# EAGLE board schematic (EAGLE 9.6.2)
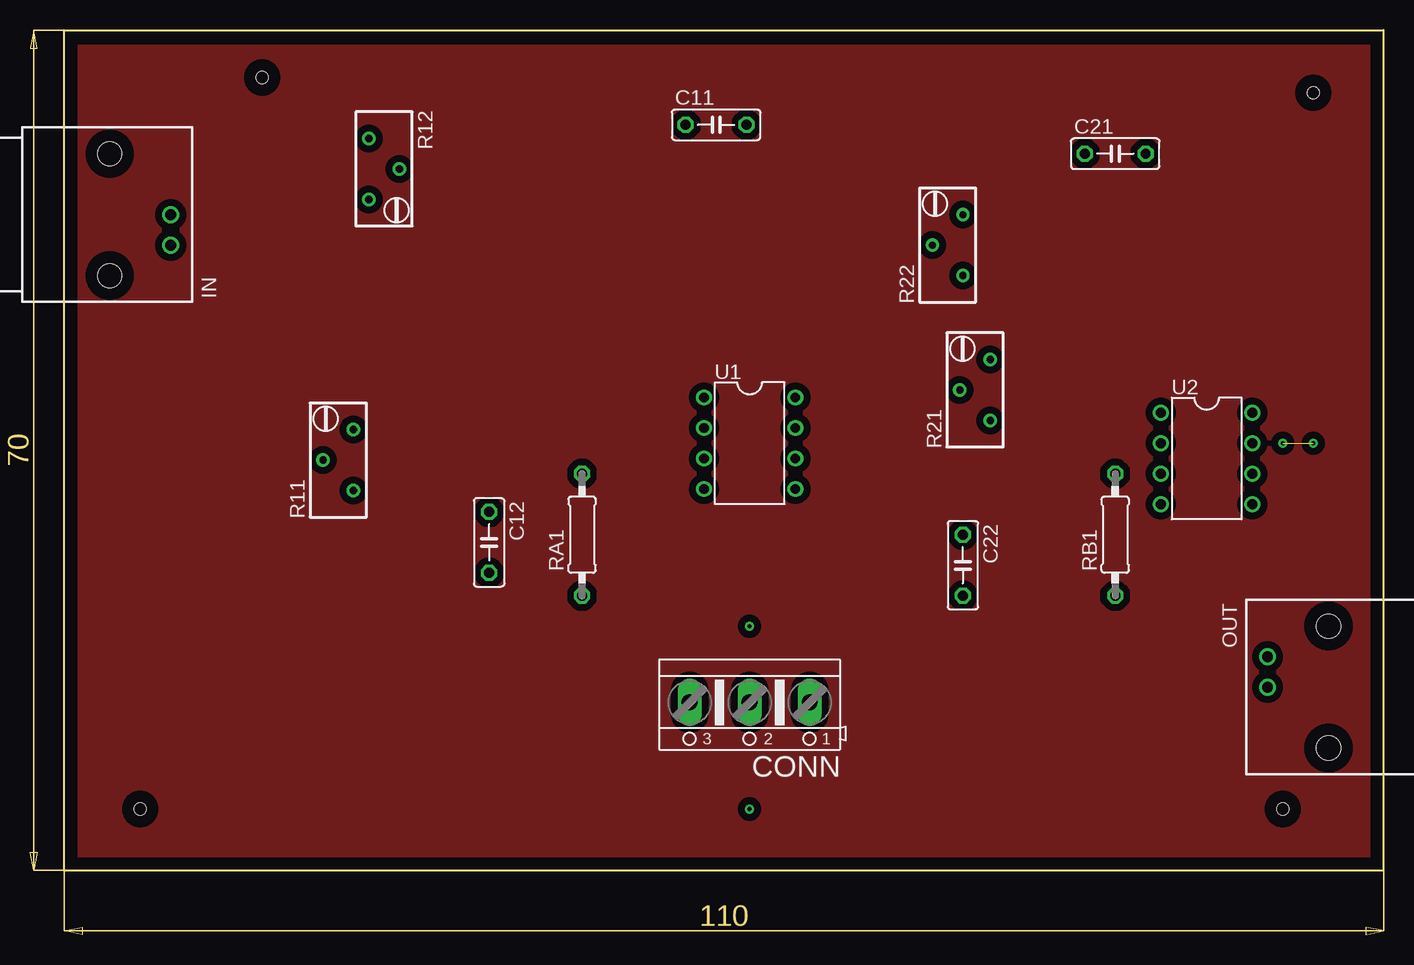
[diagram p0: board, top side]
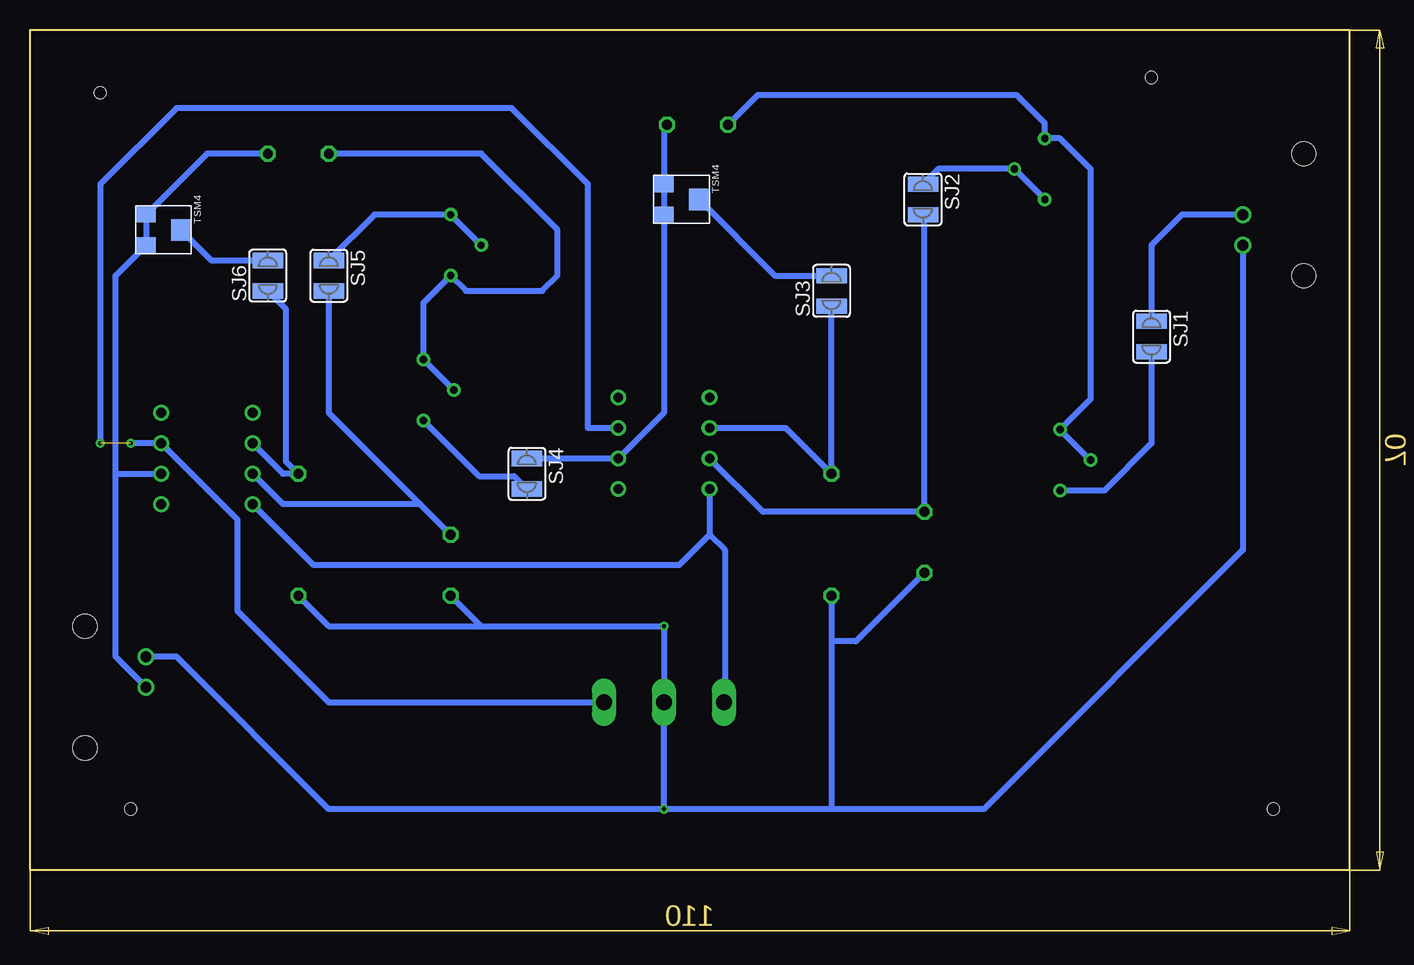
[diagram p1: board, bottom side, seen from below]

Size 110 x 70 mm. Coordinates in mm from the lower left corner, seen from the top.
Outline: 0,0 0,70 110,70 110,0 0,0
Copper layers (1*16): Top 0.035mm / dielectric 1.5mm / Bottom 0.035mm
Design rules "default *": minimum track width 20mil, minimum drill 0.35mm, track to track 23mil, track to pad 23mil, pad to pad 6mil, via to via 23mil, smd to smd 6mil, copper to edge 40mil, drill to drill 6mil, minimum pad ring 10mil, minimum via ring 8mil, stop-mask expansion 4mil, vias tented up to drill 0mil, thermal gap 10mil
Holes 1 mm at 16.51,66.04 6.35,5.08 101.6,5.08 104.14,64.77

## Footprints (pad centres in the part's own frame; a part is rotated, then mirrored left to right if it is on the bottom)
C050-025X075 = drill 0.813 octagon: 1 -2.54,0; 2 2.54,0
AK500/3 = drill 1.321 long: 1 -5.004,0; 2 0,0; 3 5.004,0
AMP_227161 = drill 0.9 pad 1.27: 1 0,-5.08; 2 -2.54,-5.08 | hole 2: -5.08,0; 5.08,0
RTRIMT93YB = drill 0.61: 1 1.27,-2.54; 2 -1.27,0; 3 1.27,2.54
0207/10 = drill 0.813 octagon: 1 -5.08,0; 2 5.08,0
TSM4YJ = smd 1.3 x 1.6: 1 -1.27,0; 3 1.27,0 | smd 1.8 x 1.6: 2 0,2.9
SJW = smd 1.27 x 2.54: 1 -1.27,0; 2 1.27,0
DIL08 = drill 0.813 pad 1.27: 1 -3.81,-3.81; 2 -1.27,-3.81; 3 1.27,-3.81; 4 3.81,-3.81; 5 3.81,3.81; 6 1.27,3.81; 7 -1.27,3.81; 8 -3.81,3.81

## Placement (x,y rotation side)
C11  27n  [C050-025X075]  54.36,62.1 0 top
C12  22n  [C050-025X075]  35.43,27.3 270 top
C21  27n  [C050-025X075]  87.63,59.69 0 top
C22  22n  [C050-025X075]  74.93,25.4 270 top
CONN  [AK500/3]  57.15,13.97 180 top
IN  1-227161-6  [AMP_227161]  3.81,54.61 90 top
OUT  1-227161-6  [AMP_227161]  105.41,15.24 270 top
R11  85.332K  [RTRIMT93YB]  22.86,34.16 0 top
R12  19.99K  [RTRIMT93YB]  26.67,58.42 180 top
R21  85.332K  [RTRIMT93YB]  75.95,40.01 0 top
R22  19.99K  [RTRIMT93YB]  73.66,52.07 0 top
RA1  1K  [0207/10]  43.18,27.94 90 top
RA2  POTENCIOMETRO  [TSM4YJ]  57.15,55.88 270 bottom
RB1  1K  [0207/10]  87.63,27.94 90 top
RB2  POTENCIOMETRO  [TSM4YJ]  100.33,53.34 270 bottom
SJ1  [SJW]  16.51,44.45 270 bottom
SJ2  [SJW]  35.56,55.88 270 bottom
SJ3  [SJW]  43.18,48.26 90 bottom
SJ4  [SJW]  68.58,33.02 270 bottom
SJ5  [SJW]  85.09,49.53 270 bottom
SJ6  [SJW]  90.17,49.53 90 bottom
U1  LF411N  [DIL08]  57.15,35.56 270 top
U2  LF411N  [DIL08]  95.25,34.29 270 top

## Library data of the parts
C11 C12 C21 C22 = rcl; SPICEPREFIX: C
CONN = con-ptr500; OC_FARNELL: unknown; OC_NEWARK: unknown
IN OUT = con-coax; MF: TYCO ELECTRONICS; MPN: 1-227161-6; OC_FARNELL: unknown; OC_NEWARK: 09H7854
R11 R12 R21 R22 = rcl; SPICEMODEL: X; SPICEPREFIXL: POT
RA1 RB1 = rcl; SPICEPREFIX: R
RA2 RB2 = TSM4_Vishay
SJ1-SJ6 = jumper
U1 U2 = linear

## Nets
N$1: IN.1 SJ1.1
N$2: R11.1 SJ1.2
N$3: C11.1 R11.2 R11.3 R12.1
N$4: R12.2 R12.3 SJ2.1
N$5: C12.1 SJ2.2 U1.3
N$6: RA1.2 SJ3.1 U1.2
N$7: C12.2 C22.2 CONN.2 IN.2 OUT.2 RA1.1 RB1.1
N$8: C11.2 RA2.1 RA2.3 SJ4.1 U1.6
N$9: R21.1 SJ4.2
N$10: RA2.2 SJ3.2
N$11: C21.1 R21.2 R21.3 R22.1
N$12: R22.2 R22.3 SJ5.1
N$13: C22.1 SJ5.2 U2.3
N$14: C21.2 OUT.1 RB2.1 RB2.3 U2.6
N$16: RB1.2 SJ6.1 U2.2
N$17: RB2.2 SJ6.2
N$18: CONN.1 U1.7 U2.7
N$19: CONN.3 U1.4 U2.4

## Tracks (layer width: path | path; a pad name or v marks a point on that pad's centre or on a via)
GND
  pour Top: 1.27,68.58 109.22,68.58 109.22,1.27 1.27,1.27
N$1
  Bottom 0.508: IN.1 13.97,54.61 16.51,52.07 SJ1.1
N$2
  Bottom 0.508: SJ1.2 16.51,35.56 20.45,31.62 R11.1
N$3
  Bottom 0.508: C11.1 49.34,64.58 27.75,64.58 25.4,62.23 R12.1 24.13,60.96 21.59,58.42 21.59,39.24 R11.3 R11.2
N$4
  Bottom 0.508: SJ2.1 34.29,58.42 R12.2 R12.3
N$5
  Bottom 0.508: SJ2.2 35.43,54.48 C12.1 48.9,29.84 U1.3
N$6
  Bottom 0.508: SJ3.1 RA1.2 46.99,36.83 U1.2
N$7  (via drill 0.35)
  Bottom 0.508: IN.2 8.89,26.67 30.48,5.08 43.18,5.08 | 43.18,5.08 v57.15,5.08 | v57.15,5.08 CONN.2 v57.15,20.32 72.39,20.32 | v57.15,5.08 85.09,5.08 97.79,17.78 OUT.2 | RA1.1 43.18,19.05 | 43.18,19.05 43.18,5.08 | C12.2 41.15,19.05 43.18,19.05 | C22.2 72.39,20.32 | RB1.1 85.09,20.32 72.39,20.32
N$8
  Bottom 0.508: C11.2 57.15,61.85 RA2.1 RA2.3 57.15,38.1 U1.6 SJ4.1
N$9
  Bottom 0.508: SJ4.2 69.65,32.82 72.57,32.82 R21.1
N$10
  Bottom 0.508: RA2.2 47.9,49.53 SJ3.2
N$11
  Bottom 0.508: R22.1 74.68,49.28 | R22.1 73.66,48.26 67.31,48.26 66.04,49.53 66.04,53.34 72.39,59.69 C21.1 | R21.2 R21.3 77.22,47.24 R22.1
N$12
  Bottom 0.508: R22.2 R22.3 81.28,54.61 SJ5.1
N$13
  Bottom 0.508: SJ5.2 85.09,38.1 C22.1 77.47,30.48 88.9,30.48 U2.3
N$14
  Bottom 0.508: C21.2 95.25,59.69 RB2.1 RB2.3 102.87,49.53 102.87,33.02 | OUT.1 102.87,17.78 102.87,33.02 | 102.87,33.02 U2.6
N$16
  Bottom 0.508: SJ6.1 88.67,46.76 88.67,34.06 RB1.2 88.9,33.02 U2.2
N$17
  Bottom 0.508: RB2.2 94.89,50.8 SJ6.2
N$18  (via drill 0.35)  (1 unrouted)
  Bottom 0.508: CONN.1 85.09,13.97 92.71,21.59 92.71,29.21 U2.7 v101.6,35.56 | U1.7 63.5,36.83 63.5,57.15 69.85,63.5 97.79,63.5 104.14,57.15 v104.14,35.56
N$19
  Bottom 0.508: U1.4 53.34,27.94 | 53.34,27.94 55.88,25.4 86.36,25.4 U2.4 | 53.34,27.94 52.07,26.67 52.07,14.05 CONN.3